# Altium PCB wireTest.PcbDoc (part 2 of 2)
Units mm, origin at the board's own origin, x right, y up, seen from the top; angles counter-clockwise.
Board outline 121.22 x 130.26 mm, 2 copper layers (Top Layer, Bottom Layer); 157 components, 144 nets, 513 pads, 186 vias.
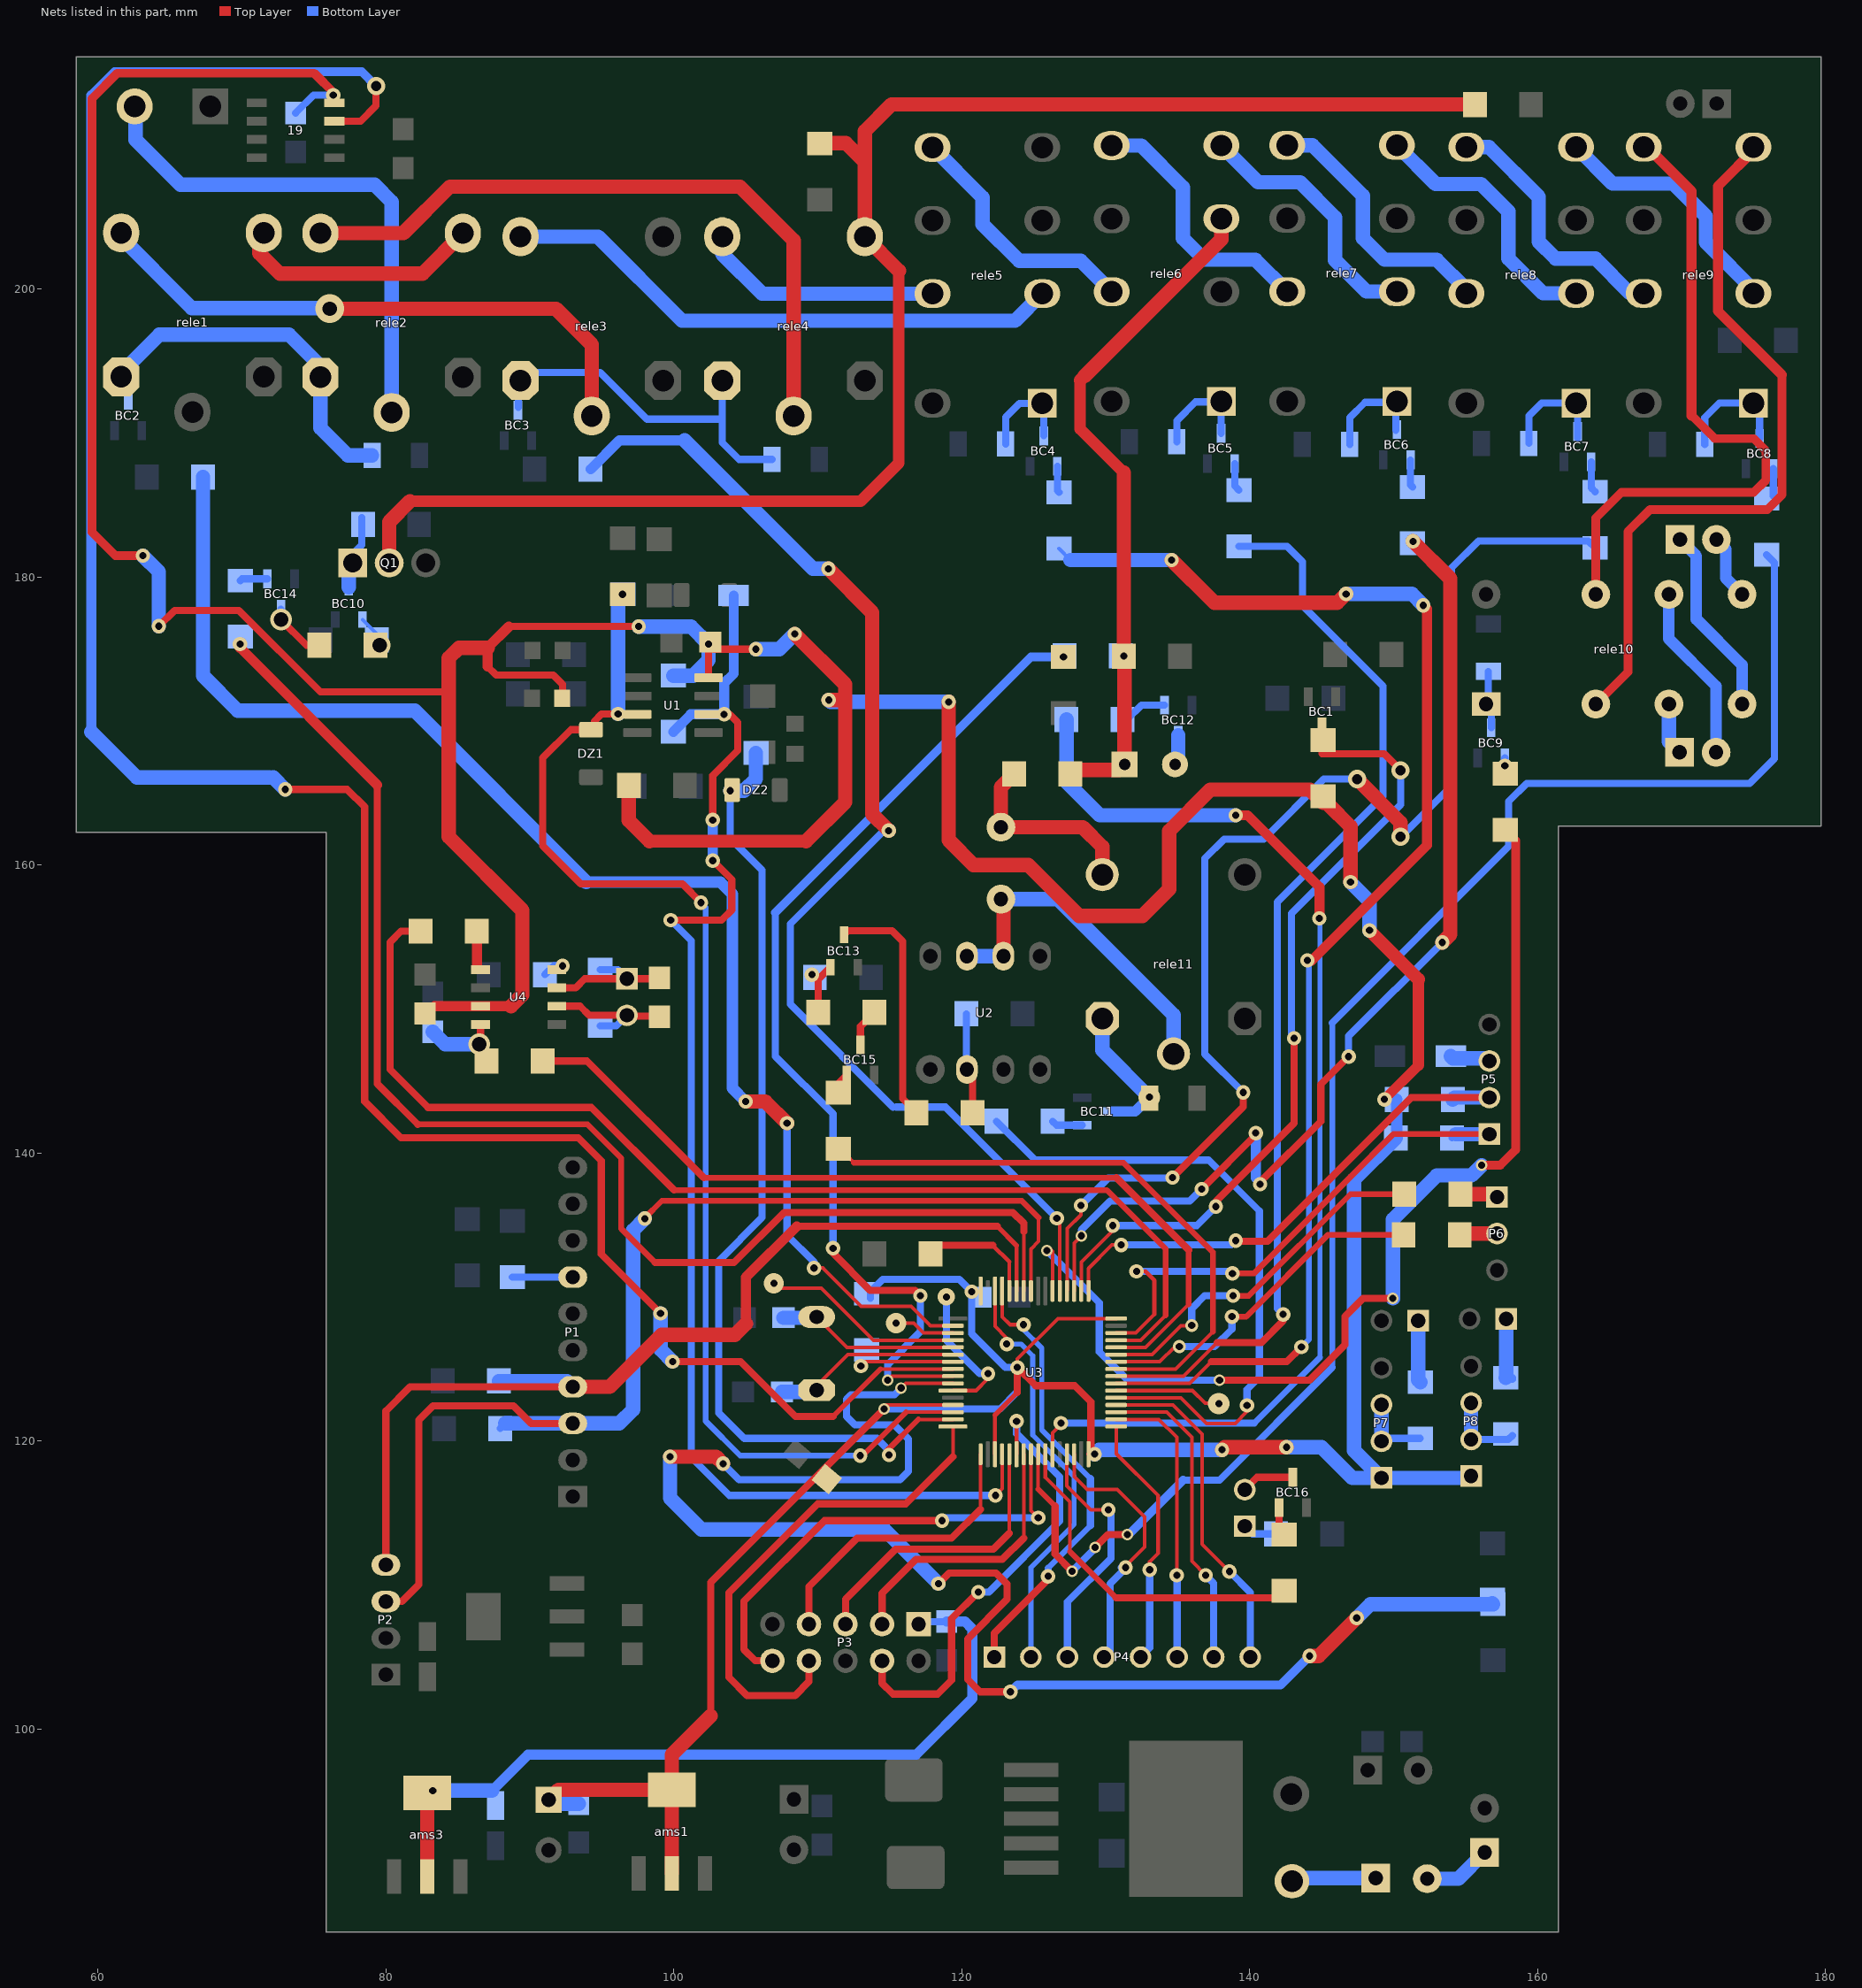
[diagram p2: the nets of this part, all layers, seen from the top]

## Via types
v1: diameter 1, hole 0.5, Top Layer to Bottom Layer, 140 vias
v2: diameter 1.5, hole 1, Top Layer to Bottom Layer, 15 vias
v3: diameter 0.8, hole 0.5, Top Layer to Bottom Layer, 12 vias
v4: diameter 1.27, hole 0.711, Top Layer to Bottom Layer, 6 vias
v5: diameter 2, hole 1, Top Layer to Bottom Layer, 5 vias
v6: diameter 1.5, hole 0.5, Top Layer to Bottom Layer, 3 vias
v7: diameter 1.4, hole 0.5, Top Layer to Bottom Layer, 2 vias
v8: diameter 0.9, hole 0.5, Top Layer to Bottom Layer, 2 vias
v9: diameter 1.2, hole 0.5, Top Layer to Bottom Layer, 1 vias

## Nets (pads, with @x,y where several pads share a name; then routed paths per layer and width w, separated by ;. In a path a pad name is that pad's centre, name@x,y a point inside that pad or via, vN(x,y) a via of type N, cw(c..) or ccw(c..) an arc to the next point about the centre after c; other vN are vias at no path point) (continued)
Net28_1: 28.1 BC4.1 | length 1.9
  Bottom Layer w0.5: BC4.1@126.655,187.697 126.655,185.988 28.1@126.771,185.871
Net29_1: 29.1 BC5.1 | length 2
  Bottom Layer w0.5: BC5.1@138.974,187.875 138.974,186.318 29.1@139.268,186.024
Net30_1: 30.1 BC6.1 | length 1.9
  Bottom Layer w0.5: BC6.1@151.191,188.129 151.191,186.395 30.1@151.333,186.252
Net31_1: 31.1 BC7.1 | length 2.2
  Bottom Layer w0.5: BC7.1@163.739,188.002 163.739,186.191 31.1@164.008,185.922
Net32_1: 32.1 BC8.1 | length 2.2
  Bottom Layer w0.5: BC8.1@176.388,187.52 176.388,185.633 32.1@176.606,185.414
Net33_1: 33.1 BC9.1 | length 0.5
  Bottom Layer w0.5: v1(157.744,166.893) BC9.1@157.744,167.428
Net35_1: 35.1 38.2 BC10.1 | length 2.1
  Top Layer w0.5: 38.2@79.293,175.26 v2(79.578,175.26)
  Bottom Layer w0.25: BC10.1@78.384,177.038 79.369,176.053 35.1@79.369,175.616
Net36_2: 36.2 BC12.1 | length 3.3
  Bottom Layer w0.5: 36.2@131.185,170.104 131.496,170.104 132.495,171.103 BC12.1@134.102,171.103
Net37_1: 37.1 BC11.1 | length 2.2
  Bottom Layer w0.5: 37.1@126.334,142.189 126.598,141.925 BC11.1@128.388,141.925
Net38_1: 38.1 BC14.3 | length 4.1
  Top Layer w0.5: v2(72.72,177.038) 74.498,175.26 38.1@75.393,175.26
  Bottom Layer w0.5: v2(72.72,177.038) BC14.3@72.72,177.766
Net39_1: 39.1 P1.7 | length 4.2
  Bottom Layer w0.5: 39.1@88.798,131.375 92.984,131.375 P1.7@92.989,131.369
Net41_1: 41.1 46.2 BC13.1 | length 3.5
  Top Layer w0.5: 46.2@110.039,149.758 110.039,152.053 BC13.1@110.886,152.901
  other v1: 109.601,152.375
Net42_2: 42.2 48.1 U2.2 | length 7
  Top Layer w0.5: U2.2@120.371,145.798 120.771,145.397 48.1@120.771,142.799
  Bottom Layer w0.5: 42.2@120.326,149.657 120.326,145.843 U2.2@120.371,145.798
Net43_2: 43.2 BC10.3 Q1.1 | length 4.6
  Bottom Layer w0.5: Q1.1@77.699,181.585 78.339,182.225 43.2@78.339,184.125
  Bottom Layer w1: BC10.3@77.434,179.288 77.434,180.711 Q1.1@77.699,180.975
Net45_1: 45.1 BC14.1 | length 1.9
  Bottom Layer w0.5: 45.1@69.901,179.75 70.017,179.866 BC14.1@71.77,179.866
Net46_1: 46.1 BC15.3 | length 2.6
  Top Layer w0.5: BC15.3@112.979,147.506 112.979,148.799 46.1@113.939,149.758
Net47_2: 47.2 BC12.3 | length 2.1
  Bottom Layer w1: 47.2@134.823,166.98 135.052,167.208 BC12.3@135.052,169.003
Net48_2: 48.2 BC13.3 | length 16.8
  Top Layer w0.5: BC13.3@111.836,155.151 112.108,155.423 115.164,155.423 115.9,154.686 115.9,143.77 48.2@116.871,142.799
Net49_2: 49.2 L1.2 rele11.2 | length 13.6
  Top Layer w1: 49.2@123.653,166.319 122.733,165.399 L1.2@122.733,162.622 128.412,162.622 129.775,161.259 rele11.2@129.775,159.327
Net50_1: 50.1 BC15.1 | length 0.9
  Top Layer w0.5: 50.1@111.379,144.756 BC15.1@112.029,145.406
Net53_1: 53.1 ams3.2 ams3.4 C3.1 P3.1 | length 54.8
  Top Layer w1: ams3.2@82.88,89.734 ams3.4@82.88,95.534
  Bottom Layer w0.5: P3.1@117.018,107.264 117.199,107.446 53.1@118.974,107.446
  Bottom Layer w0.7: 87.376,95.707 89.865,98.196 116.84,98.196 120.752,102.108 120.752,106.934 120.24,107.446 53.1@118.974,107.446
  Bottom Layer w1: v1(83.261,95.707) 87.376,95.707
Net54_2: 54.2@156.921,108.655 57.2 U3.10 | length 110.3
  Top Layer w0.25: v3(115.799,123.673) 116.115,123.989 U3.10@119.4,123.989
  Top Layer w0.5: v1(118.389,110.084) 119.126,110.82 122.403,110.82 123.165,110.058 123.165,108.991 120.421,106.248 120.421,103.429 121.285,102.565 v1(123.393,102.565)
  Top Layer w1: v1(99.746,118.897) 102.946,118.897 v1(103.429,118.415) ; v1(144.17,105.054) 144.805,105.054 v1(147.447,107.696)
  Bottom Layer w0.35: v3(115.799,123.673) v3@115.824,123.673
  Bottom Layer w0.5: v1(103.429,118.415) 104.546,117.297 115.722,117.297 116.307,117.881 116.307,120.117 115.316,121.107 112.598,121.107 112.014,121.691 112.014,122.885 112.319,123.19 115.341,123.19 v3@115.824,123.673
  Bottom Layer w0.6: v1(123.393,102.565) 123.876,103.048 142.164,103.048 v1(144.17,105.054)
  Bottom Layer w1: v1(99.746,118.897) 99.746,116.027 101.93,113.843 114.63,113.843 v1(118.389,110.084) ; v1(147.447,107.696) 148.406,108.655 54.2@156.921,108.655 57.2@156.865,108.712
Net55_1: 55.1@113.411,126.32 U3.7 | length 6.7
  Top Layer w0.25: v1(113.005,125.197) 112.928,125.197 113.221,125.489 U3.7@119.4,125.489
Net56_1: 56.1 U3.60 | length 8.2
  Top Layer w0.25: 56.1@117.85,132.994 56.1@118.434,133.579 ; U3.60@123.32,130.409 123.32,132.433
  Top Layer w0.3: 122.174,133.579 123.32,132.433
  Top Layer w0.5: 56.1@118.434,133.579 122.174,133.579
Net60_2: 60.2 U3.5 Y1.2 | length 12.7
  Top Layer w0.25: Y1.2@109.931,128.6 112.042,126.489 U3.5@119.4,126.489
  Bottom Layer w1: 60.2@107.624,128.549 109.88,128.549 Y1.2@109.931,128.6
Net61_2: 61.2 P6.2 | length 2.6
  Top Layer w0.25: 61.2@154.604,134.315 61.2@155.092,134.315
  Top Layer w1: 61.2@155.092,134.315 155.169,134.391 P6.2@157.201,134.391
Net62_2: 62.2 P6.1 | length 2.6
  Top Layer w1: 62.2@154.655,137.135 156.997,137.135 P6.1@157.201,136.931
Net63_1: 63.1 buzzer1.1 | length 2.4
  Bottom Layer w0.5: buzzer1.1@139.67,114.071 140.203,113.538 63.1@141.834,113.538
Net64_2: 64.2 U3.6 Y1.1 | length 13.1
  Top Layer w0.25: Y1.1@109.931,123.52 109.931,123.825 112.096,125.989 U3.6@119.4,125.989
  Bottom Layer w1: 64.2@107.522,123.393 109.804,123.393 Y1.1@109.931,123.52
Net66_1: 66.1 BC16.1 | length 2
  Top Layer w0.5: BC16.1@142.062,115.367 142.062,113.837 66.1@142.418,113.481
Net68_1: 68.1 led1.1 | length 4.3
  Bottom Layer w1: led1.1@151.714,128.346 151.714,124.226 68.1@151.867,124.073
Net68_2: 68.2 P7.2 P7.3 | length 5.3
  Bottom Layer w0.5: P7.2@149.174,119.964 149.383,120.173 68.2@151.867,120.173
  Bottom Layer w1: P7.2@149.174,119.964 P7.3@149.174,122.504
Net69_1: 69.1 led2.1 | length 4.2
  Bottom Layer w0.5: 69.1@158.267,124.276 69.1@158.267,124.378
  Bottom Layer w1: 69.1@157.81,124.378 157.836,124.403 led2.1@157.836,128.473
Net69_2: 69.2 P8.2 P8.3 | length 5.5
  Bottom Layer w0.5: P8.2@155.397,120.091 157.982,120.091 69.2@158.267,120.376
  Bottom Layer w1: P8.2@155.397,120.091 P8.3@155.397,122.631
Net71_1: 71.1 73.1 U4.4 | length 6.3
  Top Layer w0.5: v2(86.487,147.549) 86.487,146.894 73.1@87.001,146.38 ; v2@86.58,147.549 U4.4@86.58,148.92
  Bottom Layer w1: 71.1@83.261,148.408 84.121,147.549 v2(86.487,147.549)
Net72_1: 72.1 U4.1 | length 2.8
  Top Layer w0.5: U4.1@86.329,152.982 U4.1@86.58,152.73
  Top Layer w0.7: U4.1@86.329,152.982 72.1@86.329,155.397
Net74_1: 74.1 75.2 buzzer2.1 U4.7 | length 9.6
  Top Layer w0.5: U4.7@91.88,151.46 93.193,151.46 93.828,152.095 buzzer2.1@96.749,152.095 98.955,152.095 75.2@99.06,152.201
  Bottom Layer w0.5: 74.1@94.894,152.724 96.119,152.724 buzzer2.1@96.749,152.095
Net74_2: 74.2 75.1 buzzer2.2 U4.6 | length 9.6
  Top Layer w0.5: U4.6@91.88,150.19 93.497,150.19 94.132,149.555 buzzer2.2@96.749,149.555 96.803,149.501 75.1@99.06,149.501
  Bottom Layer w0.5: 74.2@94.894,148.824 96.018,148.824 buzzer2.2@96.749,149.555
Net76_1: 76.1 U4.8 | length 1.5
  Bottom Layer w0.5: 76.1@91.053,152.375 91.663,152.984 v1(92.278,152.984)
NetBC2_3: BC2.3 D5.1 rele1.4 rele2.4 | length 25.6
  Bottom Layer w0.5: rele1.4@61.322,193.208 rele1.4@61.322,193.878
  Bottom Layer w1: rele1.4@61.322,193.878 64.268,196.825 73.279,196.825 75.463,194.64 rele2.4@75.463,193.878 75.463,190.348 77.368,188.443 D5.1@79.045,188.443
NetBC3_3: BC3.3 D6.1 rele3.4 rele4.4 | length 25.8
  Bottom Layer w0.5: BC3.3@89.205,191.772 89.205,193.48 rele3.4@89.36,193.636 89.933,194.208 94.894,194.208 98.146,190.957 103.378,190.957 ; rele4.4@103.378,193.632 103.378,189.332 104.546,188.163 D6.1@106.832,188.163
NetBC4_3: BC4.3 D7.1 rele5.1 | length 7.1
  Bottom Layer w0.5: D7.1@123.061,189.23 123.061,191.108 124.011,192.058 rele5.1@125.603,192.058 125.705,191.956 BC4.3@125.705,189.797
NetBC5_3: BC5.3 D8.1 rele6.1 | length 7.3
  Bottom Layer w0.5: D8.1@134.95,189.382 134.95,190.856 136.254,192.159 rele6.1@138.024,192.159 ; BC5.3@138.024,189.975 rele6.1@138.024,192.159 ; rele6.1@138.049,192.185 rele6.1@138.024,192.159
NetBC6_3: BC6.3 D9.1 rele7.1 | length 7.5
  Bottom Layer w0.5: D9.1@146.964,189.205 146.964,191.059 148.031,192.126 rele7.1@150.165,192.126 ; BC6.3@150.165,190.195 rele7.1@150.165,192.126 ; rele7.1@150.241,192.202 rele7.1@150.165,192.126
NetBC7_3: BC7.3 D10.1 rele8.1 | length 8
  Bottom Layer w0.5: D10.1@159.41,189.281 159.41,191.186 160.299,192.075 rele8.1@162.687,192.075 162.789,191.973 BC7.3@162.789,189.645
NetBC8_3: BC8.3 D11.1 rele9.1 | length 8.4
  Bottom Layer w0.5: D11.1@171.628,189.205 171.628,191.059 172.644,192.075 175.26,192.075 175.438,191.897 BC8.3@175.438,189.62
NetBC9_3: BC9.3 D12.1 rele10.1 | length 4.1
  Bottom Layer w0.5: D12.1@156.591,173.433 156.591,171.323 rele10.1@156.439,171.171 156.794,170.815 BC9.3@156.794,169.528
NetBC11_3: BC11.3 D13.1 rele11.4 | length 9.8
  Bottom Layer w0.7: BC11.3@130.488,142.875 132.055,142.875 v6(133.045,143.866)
  Bottom Layer w1: rele11.4@129.775,149.327 129.775,147.136 v6(133.045,143.866)
NetBC16_3: BC16.3 buzzer1.2 | length 3.7
  Top Layer w0.5: buzzer1.2@139.67,116.611 140.525,117.467 BC16.3@143.012,117.467
NetD14_A: D14.A P5.3 | length 2.8
  Bottom Layer w1: D14.A@153.982,146.71 154.134,146.558 156.489,146.558 P5.3@156.667,146.38
NetDin1_1: Din1.1 Inbutton1.1 | length 5.9
  Bottom Layer w1: Din1.1@142.951,89.408 143.18,89.637 Inbutton1.1@148.768,89.637
NetIn+1_1: In+1.1 Inbutton1.2 | length 4.7
  Bottom Layer w1: Inbutton1.2@152.349,89.586 154.508,89.586 In+1.1@156.337,91.415
NetInbutton3_1: Inbutton3.1 rele10.8 | length 13.2
  Bottom Layer w0.8: Inbutton3.1@169.901,182.601 171.044,181.458 171.044,177.063 174.219,173.888 rele10.8@174.219,171.171
NetInbutton3_2: Inbutton3.2 rele10.9 | length 4.5
  Bottom Layer w0.8: Inbutton3.2@172.441,182.601 173.101,181.94 173.101,179.908 rele10.9@174.219,178.791
NetInbutton4_1: Inbutton4.1 rele10.6 | length 3.7
  Bottom Layer w1: rele10.6@169.139,171.171 169.139,168.554 Inbutton4.1@169.875,167.818
NetInbutton4_2: Inbutton4.2 rele10.11 | length 12.3
  Bottom Layer w0.8: rele10.11@169.139,178.791 169.139,175.692 172.415,172.415 Inbutton4.2@172.415,167.818
NetL1_1: L1.1 rele11.1 U2.6 U2.7 | length 24.6
  Top Layer w1: L1.1@122.733,157.622 122.911,157.444 U2.6@122.911,153.668
  Bottom Layer w1: U2.7@120.371,153.668 U2.6@122.911,153.668 ; L1.1@122.733,157.622 126.681,157.622 134.725,149.578 rele11.1@134.725,146.877
NetpinIN1_2: pinIN1.2 rele2.1 | length 36.8
  Bottom Layer w1: pinIN1.2@62.078,212.7 62.611,212.166 62.611,210.363 65.735,207.239 79.223,207.239 80.413,206.048 rele2.1@80.413,191.428
Netrele1_2: rele1.2 rele3.1 | length 41
  Top Layer w1: v5(76.098,198.628) 91.821,198.628 94.31,196.139 rele3.1@94.31,191.186
  Bottom Layer w1: rele1.2@61.322,203.878 66.521,198.679 v5@75.946,198.679
Netrele1_3: rele1.3 rele2.3 | length 17.3
  Top Layer w1: rele1.3@71.222,203.878 71.222,202.489 72.644,201.066 82.552,201.066 rele2.3@85.363,203.878
Netrele2_2: rele2.2 rele4.1 | length 47.9
  Top Layer w1: rele2.2@75.463,203.878 81.222,203.878 84.455,207.112 104.597,207.112 108.328,203.381 rele4.1@108.328,191.182
Netrele3_2: rele3.2 rele5.4 | length 39.4
  Bottom Layer w1: rele3.2@89.36,203.636 94.738,203.636 100.584,197.79 123.715,197.79 rele5.4@125.603,199.678
Netrele4_2: rele4.2 rele5.13 | length 16.9
  Bottom Layer w1: rele4.2@103.378,203.632 103.378,202.438 106.138,199.678 rele5.13@117.983,199.678
Netrele5_9: rele5.9 rele6.13 | length 17.7
  Bottom Layer w1: rele5.9@117.983,209.838 121.463,206.358 121.463,204.495 124.003,201.955 128.278,201.955 rele6.13@130.429,199.805
Netrele6_8: rele6.8 rele7.4 | length 18.1
  Bottom Layer w1: rele6.8@138.049,209.965 140.597,207.416 143.51,207.416 145.948,204.978 145.948,202.006 148.133,199.822 rele7.4@150.241,199.822
Netrele6_9: rele6.9 rele7.13 | length 18.5
  Bottom Layer w1: rele6.9@130.429,209.965 132.478,209.965 135.382,207.061 135.382,203.53 136.881,202.032 140.411,202.032 rele7.13@142.621,199.822
Netrele7_8: rele7.8 rele8.4 | length 18.6
  Bottom Layer w1: rele7.8@150.241,209.982 152.933,207.289 156.083,207.289 157.988,205.384 157.988,202.108 160.401,199.695 rele8.4@162.687,199.695
Netrele7_9: rele7.9 rele8.13 | length 18.6
  Bottom Layer w1: rele7.9@142.621,209.982 144.374,209.982 147.879,206.477 147.879,203.53 149.377,202.032 153.01,202.032 155.067,199.974 rele8.13@155.067,199.695
Netrele8_8: rele8.8 rele9.4 | length 17.8
  Bottom Layer w1: rele8.8@162.687,209.855 165.227,207.315 169.443,207.315 171.704,205.054 171.704,203.251 rele9.4@175.26,199.695
Netrele8_9: rele8.9 rele9.13 | length 18.6
  Bottom Layer w1: rele8.9@155.067,209.855 156.642,209.855 160.096,206.4 160.096,203.276 161.265,202.108 164.033,202.108 166.446,199.695 rele9.13@167.64,199.695
Netrele9_8: rele9.8 rele10.4 | length 51.8
  Top Layer w0.6: rele10.4@164.059,171.171 166.294,173.406 166.294,183.159 167.818,184.683 175.971,184.683 176.987,185.699 176.987,194.031
  Top Layer w0.7: rele9.8@175.26,209.855 172.542,207.137 172.542,198.476 176.987,194.031
Netrele9_9: rele9.9 rele10.13 | length 46.3
  Top Layer w0.6: rele10.13@164.059,178.791 164.059,184.099 165.837,185.877 175.031,185.877 175.87,186.715 175.87,188.773 175.031,189.611 172.314,189.611 170.713,191.211
  Top Layer w0.7: rele9.9@167.64,209.855 170.713,206.781 170.713,191.211
NetU3_3: U3.3 | length 4.2
  Top Layer w0.25: v7(115.443,128.168) 116.688,128.168 117.367,127.489 U3.3@119.4,127.489
NetU3_4: U3.4 | length 14.1
  Top Layer w0.25: v7(106.959,130.937) 107.29,130.607 110.261,130.607 113.879,126.989 U3.4@119.4,126.989
NetU3_11: U3.11 | length 10
  Top Layer w0.25: U3.11@119.4,123.489 121,123.489 121.844,124.333 v1(121.844,124.663)
  Bottom Layer w0.5: v9(118.948,129.997) 118.948,126.975 121.26,124.663 v1(121.844,124.663)
NetU3_38: U3.38 | length 7.5
  Top Layer w0.25: U3.38@130.74,123.489 136.048,123.489 136.931,122.606 137.871,122.606 v6(137.871,122.58)
outSelonoeid: 24.2 25.1 Q1.2 rele4.3 | length 110.6
  Top Layer w0.8: 81.686,185.268 113.005,185.268 115.646,187.909 115.646,201.264
  Top Layer w1: Q1.2@80.239,180.975 80.239,183.82 81.686,185.268 ; 25.1@110.134,210.103 110.166,210.134 111.963,210.134 113.278,208.819 ; 115.646,201.264 rele4.3@113.278,203.632 113.278,208.819 ; 24.2@155.397,212.827 115.138,212.827 113.278,210.966 113.278,208.819
outSimulation+5: 44.2 47.1 49.1 51.1 rele6.6 | length 47.3
  Top Layer w0.8: 128.245,193.65 128.245,190.271 131.273,187.243
  Top Layer w0.9: 128.245,193.65 128.549,193.954
  Top Layer w1: 49.1@127.553,166.319 127.832,166.599 130.942,166.599 47.1@131.323,166.98 131.323,174.448 v1(131.273,174.498) 131.273,187.243 ; 128.549,193.954 138.049,203.454 rele6.6@138.049,204.885
pa0: 11.2 13.1 DZ1.2 U1.3 U3.14 | length 89.6
  Top Layer w0.25: DZ1.2@94.259,169.392 DZ1.2@94.488,169.392 ; v1(112.954,118.974) v1@113.132,118.974 ; 116.147,121.989 U3.14@119.4,121.989
  Top Layer w0.4: v1@113.132,118.974 116.147,121.989
  Top Layer w0.5: DZ1.2@94.259,169.392 92.861,169.392 90.907,167.437 90.907,161.315 93.548,158.674 100.609,158.674 v1(101.905,157.378) ; DZ1.2@94.488,169.392 94.488,169.977 94.996,170.485 v1(96.139,170.485)
  Bottom Layer w0.25: v1(101.905,157.378) v1@102.235,157.048
  Bottom Layer w0.4: v1@102.235,157.048 102.235,121.361 104.623,118.974 v1(112.954,118.974)
  Bottom Layer w1: v1(96.139,170.485) 96.139,178.492 v1(96.444,178.796)
pa1: 15.2 DZ2.2 U3.15 | length 68.6
  Top Layer w0.25: v1@114.833,119.329 115.138,119.024 v1(114.96,119.024) ; 116.994,121.489 U3.15@119.4,121.489
  Top Layer w0.4: v1@114.833,119.329 116.994,121.489
  Bottom Layer w0.5: v1(103.937,165.151) 103.937,161.849 106.147,159.639 106.147,135.509 103.124,132.486 103.124,121.945 104.902,120.167 114.122,120.167 114.96,119.329 v1(114.96,119.024)
  Bottom Layer w1: v1(103.937,165.151) 104.877,165.151 105.715,165.989 15.2@105.715,167.773
pa2: P3.8 U3.16 | length 35.4
  Top Layer w0.25: 119.4,118.892 U3.16@119.4,120.989
  Top Layer w0.5: P3.8@109.398,104.724 109.398,103.276 108.433,102.311 105.105,102.311 103.835,103.581 103.835,109.449 110.007,115.621 116.129,115.621 119.4,118.892
pa3: P3.7 U3.17 | length 20.6
  Top Layer w0.25: 121.32,115.249 U3.17@121.32,119.069
  Top Layer w0.5: P3.7@109.398,107.264 109.398,109.88 112.751,113.233 119.304,113.233 121.32,115.249
pa4: 23.2 D3.A U1.6 U3.20 | length 95.8
  Top Layer w0.25: v1(122.352,116.205) 122.82,116.673 U3.20@122.82,119.069
  Top Layer w0.5: v1(99.797,156.159) 103.327,156.159 104.038,156.87 104.038,158.979 v1(102.718,160.299) ; v1(102.718,163.119) 102.718,166.218 104.445,167.945 104.445,169.901 103.886,170.459 v1(103.505,170.459)
  Bottom Layer w0.5: v1(99.797,156.159) 101.219,154.737 101.219,118.847 103.861,116.205 v1(122.352,116.205)
  Bottom Layer w0.7: 23.2@99.974,169.246 101.188,170.459 v1(103.505,170.459) 103.505,172.618 104.172,173.286 D3.A@104.172,178.714 ; v1(102.718,160.299) v1(102.718,163.119)
pa5: P3.5 U3.21 | length 20.5
  Top Layer w0.25: 123.32,113.591 U3.21@123.32,119.069
  Top Layer w0.5: P3.5@111.938,107.264 111.938,108.991 115.418,112.471 122.199,112.471 123.32,113.591
pa6: P3.4 U3.22 | length 32.2
  Top Layer w0.25: U3.22@123.82,119.069 123.82,121.356 v1(123.825,121.361)
  Top Layer w0.5: P3.4@114.478,104.724 114.478,103.175 115.24,102.413 118.339,102.413 119.304,103.378 119.304,107.645 v1(121.158,109.499)
  Bottom Layer w0.5: v1(121.158,109.499) 121.895,109.499 126.822,114.427 126.822,117.5 123.825,120.498 v1(123.825,121.361)
pa7: P3.3 U3.23 | length 19.4
  Top Layer w0.25: 124.32,113.245 U3.23@124.32,119.069
  Top Layer w0.5: P3.3@114.478,107.264 114.478,109.398 116.84,111.76 122.834,111.76 124.32,113.245
pa8: 50.2 U3.41 | length 42.1
  Top Layer w0.25: 50.2@111.379,139.604 112.237,139.604 112.522,139.319 ; U3.41@130.74,124.989 134.87,124.989 137.465,127.584
  Top Layer w0.4: 112.522,139.319 131.242,139.319 137.465,133.096 137.465,127.584
pa9: 61.1 U3.42 | length 24.1
  Top Layer w0.25: U3.42@130.74,125.489 133.77,125.489 134.823,126.543 v8(135.128,126.543)
  Top Layer w0.4: v1(138.786,128.626) 139.776,128.626 145.466,134.315 61.1@150.704,134.315
  Bottom Layer w0.5: v8(135.128,126.543) 137.566,126.543 138.786,127.762 v1(138.786,128.626)
pa10: 62.1 U3.43 | length 25.3
  Top Layer w0.25: U3.43@130.74,125.989 133.228,125.989 135.23,127.991 135.966,127.991 v8(135.992,128.016)
  Top Layer w0.4: v1(138.862,130.073) 139.954,130.073 147.015,137.135 62.1@150.755,137.135
  Bottom Layer w0.5: v8(135.992,128.016) 135.992,129.184 136.881,130.073 v1(138.862,130.073)
pa11: 73.2 U3.44 | length 60.4
  Top Layer w0.25: U3.44@130.74,126.489 132.789,126.489 135.788,129.489
  Top Layer w0.4: 102.083,138.278 130.759,138.278 ; 135.788,129.489 135.788,133.248
  Top Layer w0.5: 73.2@90.901,146.38 93.98,146.38 102.083,138.278 ; 130.759,138.278 135.788,133.248
pa12: 72.2 U3.45 | length 79.1
  Top Layer w0.25: U3.45@130.74,126.989 132.45,126.989 134.188,128.727
  Top Layer w0.4: 100.025,137.414 130.099,137.414 134.188,133.325 134.188,128.727
  Top Layer w0.5: 72.2@82.429,155.397 81.051,155.397 80.289,154.635 80.289,145.796 82.931,143.154 94.285,143.154 100.025,137.414
pa13: 59.2 P5.1 U3.46 | length 38.3
  Top Layer w0.25: U3.46@130.74,127.489 132.112,127.489 133.401,128.778 ; v1(132.156,131.775) 132.766,131.775
  Top Layer w0.3: 132.766,131.775 133.401,131.14 133.401,128.778
  Top Layer w0.4: v1(138.811,131.623) 140.31,131.623 149.987,141.3 P5.1@156.667,141.3
  Bottom Layer w0.5: v1(132.156,131.775) 138.659,131.775 v1(138.811,131.623) ; 59.2@154.071,141.046 59.2@154.325,141.3
  Bottom Layer w1: 59.2@154.325,141.3 P5.1@156.667,141.3
pa14: 58.2 P5.2 U3.49 | length 37
  Top Layer w0.25: U3.49@128.82,130.409 128.82,131.969 130.454,133.604 v1(131.089,133.604)
  Top Layer w0.5: v1(139.04,133.909) 139.09,133.858 141.249,133.858 151.232,143.84 P5.2@156.667,143.84
  Bottom Layer w0.25: v1@131.064,133.604 v1(131.089,133.604)
  Bottom Layer w0.5: v1(131.089,133.604) 138.735,133.604 v1(139.04,133.909)
  Bottom Layer w1: 58.2@154.121,143.713 154.248,143.84 P5.2@156.667,143.84
pa15: 9.1 BC1.3 U3.50 | length 56.7
  Top Layer w0.25: U3.50@128.32,130.409 128.32,132.409 130.505,134.595 v1(130.505,134.95)
  Top Layer w0.5: v1(137.668,136.271) 137.668,136.627 143.104,142.062 v1(143.104,147.955) ; BC1.3@145.034,169.587 145.034,167.736 145.059,167.71 149.358,167.71 v4(150.495,166.573)
  Bottom Layer w0.5: v1(130.505,134.95) 136.347,134.95 v1(137.668,136.271) ; v1(143.104,147.955) 142.926,148.133 142.926,156.616 150.495,164.186 v4(150.495,166.573)
pb0: 66.2 U3.26 | length 23.9
  Top Layer w0.25: U3.26@125.82,119.069 125.82,117.462 127.533,115.748 127.533,112.293
  Top Layer w0.4: 127.533,112.293 130.734,109.093
  Top Layer w0.5: 130.734,109.093 141.929,109.093 66.2@142.418,109.581
pb1: 36.1 U3.27 | length 80.6
  Top Layer w0.25: U3.27@126.32,119.069 126.32,120.554 126.898,121.133 v1(126.898,121.234)
  Top Layer w0.7: v1(139.04,163.449) 139.878,163.449 144.856,158.471 v1(144.856,156.286)
  Bottom Layer w0.25: v1(144.856,156.286) 144.856,156.566 v1@144.907,156.616
  Bottom Layer w0.35: 144.907,125.806 v1@144.907,156.616
  Bottom Layer w0.4: 140.335,121.234 144.907,125.806
  Bottom Layer w0.5: v1(126.898,121.234) 140.335,121.234
  Bottom Layer w1: 36.1@127.285,170.104 127.285,165.755 129.591,163.449 v1(139.04,163.449)
pb6: 45.2 U3.58 | length 93.9
  Top Layer w0.25: v1@69.875,175.082 v1(69.875,175.336) ; U3.58@124.32,130.409 124.32,134.53
  Top Layer w0.4: 82.22,141.986 94.005,141.986 96.368,139.624 96.368,134.722 98.704,132.385
  Top Layer w0.5: 79.4,165.557 79.4,144.805 82.22,141.986 ; 98.704,132.385 104.191,132.385 107.671,135.865 123.571,135.865 124.32,135.116 124.32,134.53
  Top Layer w0.7: v1@69.875,175.082 79.4,165.557
pb8: P4.1 U3.61 | length 31.5
  Top Layer w0.25: U3.61@122.82,130.409 122.82,128.615 123.368,128.067 v1(124.308,128.067) ; v1(126.009,110.592) v1@126.187,110.592
  Top Layer w0.5: P4.1@122.276,104.978 122.276,106.629 126.027,110.381 v1(126.009,110.592)
  Bottom Layer w0.25: v1@124.308,127.711 v1(124.308,128.067)
  Bottom Layer w0.35: v1@124.308,127.711 125.578,126.441 125.578,120.752 128.956,117.373
  Bottom Layer w0.4: 126.009,111.15 128.956,114.097
  Bottom Layer w0.5: v1(126.009,110.592) 126.009,111.15 ; 128.956,114.097 128.956,117.373
pb9: P4.2 U3.62 | length 29.5
  Top Layer w0.25: U3.62@122.32,130.409 122.32,127.947 123.139,127.127 v1(123.139,126.721)
  Bottom Layer w0.35: v1(123.139,126.721) 124.13,126.721 124.943,125.908 124.943,120.396 127.813,117.526 127.813,114.198 124.816,111.201 P4.2@124.816,104.978
pb10: P4.3 U3.29 | length 17.3
  Top Layer w0.25: U3.29@127.32,119.069 127.32,116.876 128.981,115.214 v1(130.2,115.214)
  Bottom Layer w0.25: v1(130.2,115.214) v1@130.378,115.037
  Bottom Layer w0.5: P4.3@127.356,104.978 127.356,108.814 130.378,111.836 v1@130.378,115.037
pb11: P4.4 U3.30 | length 19
  Top Layer w0.25: U3.30@127.82,119.069 127.82,117.519 128.727,116.611 130.81,116.611 132.715,114.706 132.715,112.624 131.293,111.201 v1(131.394,111.201)
  Bottom Layer w0.5: P4.4@129.896,104.978 130.327,105.41 130.327,110.084 131.267,111.023 131.089,111.201 v1(131.394,111.201)
pb12: P4.5 U3.33 | length 17.7
  Top Layer w0.25: U3.33@130.74,120.989 130.74,119.095 133.655,116.18 133.655,112.192 133.071,111.608 v1(133.071,111.049)
  Bottom Layer w0.5: P4.5@132.436,104.978 133.071,105.613 v1(133.071,111.049)
pb13: P4.6 U3.34 | length 20
  Top Layer w0.25: U3.34@130.74,121.489 133.704,121.489 134.95,120.244 v1(134.95,110.668)
  Bottom Layer w0.5: v1(134.95,110.668) 134.976,110.642 P4.6@134.976,104.978
pb14: P4.7 U3.35 | length 21.9
  Top Layer w0.25: U3.35@130.74,121.989 134.246,121.989 135.992,120.244 135.992,111.633 v1(136.957,110.668)
  Bottom Layer w0.5: v1(136.957,110.668) 137.516,110.109 P4.7@137.516,104.978
pb15: P4.8 U3.36 | length 23.7
  Top Layer w0.25: U3.36@130.74,122.489 134.686,122.489 136.703,120.472 136.703,112.827 v1(138.608,110.922)
  Bottom Layer w0.5: v1(138.608,110.922) 140.056,109.474 P4.8@140.056,104.978
pc0: 19.7 U3.8 | length 168
  Top Layer w0.25: 114.372,124.989 U3.8@119.4,124.989
  Top Layer w0.35: 111.074,121.691 114.372,124.989
  Top Layer w0.5: v1(73.012,165.24) 77.33,165.24 78.537,164.033 78.537,143.561 81.051,141.046 93.37,141.046 94.971,139.446 94.971,132.969 v1(99.085,128.854) ; 19.7@76.436,211.658 78.257,211.658 79.324,212.725 v4(79.324,214.097) ; v1(99.924,125.501) 104.648,125.501 108.458,121.691 111.074,121.691
  Bottom Layer w0.5: 71.907,166.065 72.187,166.065
  Bottom Layer w0.6: 59.538,213.462 61.163,215.087 78.334,215.087 v4(79.324,214.097)
  Bottom Layer w0.7: 59.538,169.24 59.538,213.462
  Bottom Layer w1: 59.538,169.24 62.713,166.065 71.907,166.065 ; 72.187,166.065 v1(73.012,165.24) ; v1(99.085,128.854) 99.085,126.34 v1(99.924,125.501)
pc1: 51.2 52.2 U3.9 | length 71.5
  Top Layer w0.25: v3(114.859,124.206) 115.142,124.489 U3.9@119.4,124.489
  Top Layer w0.5: v1(111.074,133.375) 111.074,133.02 113.64,130.454 116.764,130.454 v1(117.145,130.073) ; 52.2@127.057,174.467 v1(127.076,174.447)
  Bottom Layer w0.5: 107.061,156.693 107.061,146.71 111.074,142.697 v1(111.074,133.375) ; v3(114.859,124.206) 114.859,125.298 117.145,127.584 v1(117.145,130.073)
  Bottom Layer w0.6: 107.061,156.693 124.816,174.447 v1(127.076,174.447)
pc4: P3.10 U3.24 | length 33.1
  Top Layer w0.25: U3.24@124.82,119.069 124.82,115.16 v1(125.324,114.656)
  Top Layer w0.5: P3.10@106.858,104.724 105.664,104.724 104.877,105.512 104.877,108.864 110.465,114.452 v1(118.643,114.452)
  Bottom Layer w0.5: v1(118.643,114.452) 118.847,114.656 v1(125.324,114.656)
pc5: 32.2 U3.25 | length 111.5
  Top Layer w0.25: 125.32,116.637 U3.25@125.32,119.069
  Top Layer w0.4: 125.32,116.637 126.488,115.468
  Top Layer w0.5: 126.488,115.468 126.492,115.468 126.492,112.141 v3(127.686,110.947) ; v3(129.286,112.598) 130.175,113.487 v3(131.521,113.487)
  Bottom Layer w0.25: 145.745,148.869 145.745,149.022
  Bottom Layer w0.4: 145.745,125.095 145.745,148.869
  Bottom Layer w0.5: v3(127.686,110.947) 129.286,112.547 v3(129.286,112.598) ; v3(131.521,113.487) v3@131.597,113.487 ; 135.382,117.272 137.922,117.272 145.745,125.095 ; 145.745,149.022 158.013,161.29 158.013,164.414 159.258,165.659 174.752,165.659 176.479,167.386 176.479,180.981 32.2@175.92,181.54
  Bottom Layer w0.6: v3@131.597,113.487 135.382,117.272
pc6: 37.2 U3.37 | length 45.3
  Top Layer w0.25: U3.37@130.74,122.989 135.227,122.989 137.008,121.209 139.014,121.209 139.827,122.022 v1(139.827,122.453)
  Bottom Layer w0.5: 37.2@122.434,142.189 125.126,139.497 137.16,139.497 140.691,135.966 140.691,124.435 139.827,123.571 v1(139.827,122.453)
pc8: 28.2 U3.39 | length 96.9
  Top Layer w0.25: U3.39@130.74,123.989 135.851,123.989 137.363,125.501
  Top Layer w0.5: 137.363,125.501 142.596,125.501 v1(143.612,126.517) ; v1(144.018,153.365) v1@144.323,153.365 ; v1(152.07,178.029) v1@152.324,177.775
  Top Layer w0.7: v1@144.323,153.365 152.324,161.366 v1@152.324,177.775
  Top Layer w1: v1(134.595,181.178) 137.566,178.206 146.101,178.206 v1(146.71,178.816)
  Bottom Layer w0.25: 28.2@126.771,181.971 28.2@127.565,181.178 ; v1(144.018,153.365) v1@144.141,153.242
  Bottom Layer w0.4: v1(143.612,126.517) 144.141,127.047 v1@144.141,153.242
  Bottom Layer w1: 28.2@127.565,181.178 v1(134.595,181.178) ; v1(146.71,178.816) 151.282,178.816 v1(152.07,178.029)
pc9: 29.2 U3.40 | length 76.3
  Top Layer w0.25: U3.40@130.74,124.489 135.411,124.489 137.744,126.822
  Top Layer w0.5: 137.744,126.822 140.842,126.822 142.342,128.322 v1(142.342,128.778)
  Bottom Layer w0.5: 29.2@139.268,182.124 142.615,182.124 143.688,181.051 143.688,178.003 149.276,172.415 149.276,164.77 141.935,157.429 141.935,129.184 v1(142.342,128.778)
pc10: 30.2 U3.51 | length 74.3
  Top Layer w0.25: U3.51@127.82,130.409 127.82,133.738 v3(128.321,134.239)
  Top Layer w0.5: v1(136.677,137.49) 140.437,141.249 v1(140.437,141.376) ; v1(140.741,137.82) 140.741,137.973 144.958,142.189 144.958,144.755 v1(146.888,146.685)
  Top Layer w1: v1(151.359,182.474) 153.949,179.883 153.949,155.169 v1(153.391,154.61)
  Bottom Layer w0.5: v3(128.321,134.239) 128.321,134.645 130.327,136.652 135.839,136.652 v1(136.677,137.49) ; 140.437,138.252 140.741,137.947 v1(140.741,137.82) ; v1(146.888,146.685) 146.888,148.107 v1(153.391,154.61)
  Bottom Layer w0.7: 140.437,138.252 v1(140.437,141.376)
pc11: 31.2 U3.52 | length 88
  Top Layer w0.25: U3.52@127.32,130.409 127.346,130.436 127.346,134.738 128.295,135.687 v1(128.295,136.347)
  Top Layer w0.5: v1(134.645,138.278) 139.573,143.205 v1(139.573,144.196)
  Top Layer w1: v4(147.472,165.964) 150.495,162.941 v4(150.495,161.95)
  Bottom Layer w0.5: v1(128.295,136.347) 130.2,138.252 134.62,138.252 v1(134.645,138.278) ; v1(139.573,144.196) 136.906,146.863 136.906,160.452 138.252,161.798 140.995,161.798 145.161,165.964 v4(147.472,165.964) ; v4(150.495,161.95) 154.026,165.481 154.026,180.619 155.905,182.499 163.531,182.499 31.2@164.008,182.022
pc12: 27.2 U3.53 | length 85.9
  Top Layer w0.25: v1(126.619,135.458) 126.82,135.258 U3.53@126.82,130.409
  Top Layer w1: v1(110.744,180.569) 113.792,177.521 113.792,163.525 v1(114.935,162.382)
  Bottom Layer w0.25: 115.24,143.18 115.468,143.18
  Bottom Layer w0.5: v1(114.935,162.382) 114.579,162.382 108.102,155.905 108.102,150.317 115.24,143.18 ; 115.468,143.18 118.897,143.18 v1(126.619,135.458)
  Bottom Layer w0.7: 27.2@94.228,187.477 96.235,189.484 100.762,189.484
  Bottom Layer w1: 100.762,189.484 109.677,180.569 v1(110.744,180.569)
pc13: 26.2 U3.2 | length 97.3
  Top Layer w0.25: v1(109.753,132.004) 110.363,132.004 113.03,129.337 116.484,129.337 117.832,127.989 U3.2@119.4,127.989
  Top Layer w1: v1(105.004,143.561) 106.375,143.561 v1(107.874,142.062)
  Bottom Layer w0.5: v1(107.874,142.062) 107.874,134.29 109.753,132.41 v1(109.753,132.004)
  Bottom Layer w0.8: 93.929,158.801 103.251,158.801 104.089,157.963 104.089,144.475 v1(105.004,143.561)
  Bottom Layer w1: 26.2@67.304,186.944 67.304,173.132 69.723,170.713 82.017,170.713 93.929,158.801
pd2: 33.2 U3.54 | length 75.1
  Top Layer w0.25: v3(125.933,133.223) 126.035,133.223 126.136,133.325 126.32,133.141 U3.54@126.32,130.409 ; 33.2@157.759,162.439 33.2@158.496,161.702
  Top Layer w0.5: v3(137.922,124.206) 144.17,124.206 146.634,126.67 146.634,128.626 147.904,129.896 v3(149.962,129.896)
  Top Layer w0.6: v3(156.134,139.141) 157.429,139.141 158.496,140.208 33.2@158.496,161.702
  Bottom Layer w0.5: v3(125.933,133.223) 129.565,129.591 129.565,126.187 131.547,124.206 v3(137.922,124.206)
  Bottom Layer w1: v3(149.962,129.896) 149.962,135.382 153.01,138.43 155.423,138.43 v3(156.134,139.141)
scl: 65.1 P1.3 P2.3 U3.57 | length 82.9
  Top Layer w0.25: U3.57@124.82,130.409 124.82,133.32 125.349,133.85 125.349,135.509
  Top Layer w0.4: v1@97.993,135.484 99.187,136.677 124.181,136.677 125.349,135.509
  Top Layer w0.5: P2.3@80.01,108.839 81.128,108.839 82.296,110.007 82.296,121.437 83.287,122.428 88.875,122.428 90.094,121.209 P1.3@92.989,121.209 ; v1(97.993,135.433) v1@97.993,135.484
  Bottom Layer w0.5: 65.1@87.954,120.853 65.1@88.31,121.209
  Bottom Layer w1: 65.1@88.31,121.209 P1.3@92.989,121.209 96.215,121.209 97.18,122.174 97.18,134.62 v1(97.993,135.433)
sda: 67.1 P1.4 P2.4 U3.59 | length 70.7
  Top Layer w0.25: U3.59@123.82,130.409 123.82,133.559
  Top Layer w0.35: 122.479,134.899 123.82,133.559
  Top Layer w0.5: P2.4@80.01,111.379 80.01,122.072 81.686,123.749 P1.4@92.989,123.749 ; 108.56,134.899 122.479,134.899
  Top Layer w0.7: 105.01,128.124 105.01,131.35 108.56,134.899
  Top Layer w1: P1.4@92.989,123.749 95.555,123.749 99.162,127.356 104.242,127.356 105.01,128.124
  Bottom Layer w1: 67.1@87.853,124.155 92.583,124.155 P1.4@92.989,123.749
VCC: 4.1 5.2 7.1 9.2 16.2 19.8 23.1 54.1@110.635,117.344 55.1@121.307,129.972 55.2@113.411,130.22 58.1 59.1 70.2 ams1.2 ams1.4 ca2.2 D1.2 P7.1 P8.1 U1.8 U3.13 U3.19 U3.32 U3.48 U3.64 U4.3 | length 430.2
  Top Layer w0.25: 111.862,171.45 111.912,171.399 ; v3(114.63,122.225) 114.63,122.453 114.666,122.489 U3.13@119.4,122.489 ; v1(123.876,125.095) 123.876,125.679 126.686,128.489 U3.48@130.74,128.489 ; U3.32@128.82,119.069 v1(129.241,119.069)
  Top Layer w0.3: U3.19@122.32,119.069 122.32,121.786 ; U3.32@128.82,119.069 v1@128.981,119.231
  Top Layer w0.35: 122.32,121.786 123.876,123.342
  Top Layer w0.5: v1(64.237,176.581) 65.329,177.673 69.799,177.673 75.463,172.009 84.379,172.009 ; 70.2@82.702,149.501 70.2@83.392,150.19 ; 87.071,173.787 87.681,173.177 91.643,173.177 92.287,172.534 D1.2@92.287,171.78 ; 88.544,176.555 v1(97.561,176.555) ; U1.8@102.419,172.999 v1(102.419,175.339) 102.777,174.981 v1(105.715,174.981) ; 102.565,100.889 102.565,110.16 v3(114.63,122.225) ; 123.876,123.342 v1(123.876,125.095) 125.146,123.825 127.864,123.825 128.981,122.707 v1@128.981,119.231
  Top Layer w0.6: v1(63.119,181.483) 61.214,181.483 59.588,183.109 59.588,213.233 61.341,214.986 75.032,214.986 v1@76.436,213.581
  Top Layer w0.7: 70.2@83.392,150.19 U4.3@86.58,150.19 88.697,150.19 ; 87.071,173.787 87.071,175.082 88.544,176.555 ; v1(149.377,143.713) 151.74,146.075
  Top Layer w0.8: 151.74,146.075 151.74,152.044
  Top Layer w0.9: 98.323,161.646 109.195,161.646 ; v1(148.336,155.448) 151.74,152.044
  Top Layer w1: 87.071,175.082 85.09,175.082 84.379,174.371 84.379,172.009 84.379,161.95 89.484,156.845 89.484,150.978 88.697,150.19 ; 4.1@91.313,95.07 92.006,95.762 ams1.4@99.873,95.762 ; 16.2@96.881,165.532 96.881,163.088 98.323,161.646 ; ams1.2@99.873,89.962 ams1.4@99.873,95.762 ; 102.565,100.889 99.873,98.196 ams1.4@99.873,95.762 ; v1(108.407,176.047) 111.912,172.542 111.912,171.399 111.912,164.363 109.195,161.646 ; v1(110.769,171.45) 111.862,171.45 ; v1(119.101,171.323) 119.101,161.722 120.828,159.995 124.638,159.995 128.168,156.464 132.563,156.464 134.417,158.318 134.417,162.357 137.287,165.227 144.202,165.227 9.2@145.11,164.318 ; v1(138.1,119.38) 138.278,119.558 v1(142.57,119.558) ; 9.2@145.463,164.214 147.015,162.662 v1(147.015,158.801)
  Bottom Layer w0.25: v1(149.377,143.713) 58.1@150.221,143.713
  Bottom Layer w0.5: ca2.2@73.736,212.221 74.977,213.462 v1(76.352,213.462) ; 55.2@113.665,129.896 113.665,130.353 114.529,131.216 119.837,131.216 v1(120.701,130.353) 120.701,127.432 123.038,125.095 v1(123.876,125.095) 123.876,123.419 122.682,122.225 v3(114.63,122.225) ; 59.1@150.171,141.046 59.1@150.221,141.097
  Bottom Layer w0.8: 59.1@150.221,141.097 58.1@150.221,143.713
  Bottom Layer w1: v1(63.119,181.483) 64.237,180.365 v1(64.237,176.581) ; 4.1@91.313,95.07 91.586,94.797 5.2@93.396,94.797 ; v1(97.561,176.555) 101.202,176.555 v1(102.419,175.339) 102.419,174.225 101.34,173.146 23.1@99.974,173.146 ; v1(105.715,174.981) 107.34,174.981 v1(108.407,176.047) ; v1(110.769,171.45) 110.896,171.323 v1(119.101,171.323) ; v1(129.241,119.069) 129.552,119.38 v1(138.1,119.38) ; v1(142.57,119.558) 145.009,119.558 147.142,117.424 P7.1@149.174,117.424 ; v1(147.015,158.801) 148.336,157.48 v1(148.336,155.448) ; 59.1@150.171,141.046 147.269,138.145 147.269,119.329 P7.1@149.174,117.424 ; P8.1@155.397,117.551 155.27,117.424 P7.1@149.174,117.424
pads on no net: 3.0 DZ1.0 DZ2.0 DZ3.0 P1.5 P1.6 P1.8 P1.9 P1.10 P3.6 P3.9 rele11.3 U2.3 U3.1 U3.28 U3.55 U3.56 U4.5

## Other copper
Top Layer:
  text "PAVANTECH.IR" at 82.575,213.716 h1.5
  text "PAVAN" at 86.665,211.125 h1.52
  text "09114764806" at 83.845,208.991 h1.3

## Silkscreen, mask and mechanical layers (free items; w line width, h text height)
Top Overlay:
  lines w0.2: 58.496,162.281 75.87,162.281 75.87,85.877 161.468,85.877 161.468,162.712 179.705,162.712 179.705,216.129 58.496,216.129 58.496,162.281
Bottom Overlay:
  text "+" at 105.004,178.13 h1.52

## Text inside footprints (layer, text, board x,y; h text height)
P3: Top Overlay "10" at 105.334,105.232 h1.27 r180; Top Overlay "9" at 105.334,107.772 h1.27 r180; Top Overlay "1" at 119.05,107.772 h1.27 r180; Top Overlay "2" at 119.558,105.232 h1.27 r180
rele1: Top Overlay "NC" at 61.846,200.674 h1.5; Top Overlay "NO" at 68.577,200.623 h1.5; Top Overlay "COM" at 64.538,193.232 h1.5
rele2: Top Overlay "NC" at 75.689,200.648 h1.5; Top Overlay "NO" at 82.42,200.598 h1.5; Top Overlay "COM" at 78.381,193.206 h1.5
rele3: Top Overlay "NC" at 89.586,200.406 h1.5; Top Overlay "NO" at 96.317,200.355 h1.5; Top Overlay "COM" at 92.278,192.964 h1.5
rele4: Top Overlay "NC" at 103.604,200.402 h1.5; Top Overlay "NO" at 110.335,200.351 h1.5; Top Overlay "COM" at 106.296,192.96 h1.5
rele11: Top Overlay "COM" at 132.693,148.655 h1.5; Top Overlay "NO" at 136.731,156.046 h1.5; Top Overlay "NC" at 130,156.097 h1.5